# Altium PCB TFT_Adapter_Board_拼版.PcbDoc (part 1 of 9)
Units mm, origin at the board's own origin, x right, y up, seen from the top; angles counter-clockwise.
Board outline 137 x 166.56 mm, 2 copper layers (Top Layer, Bottom Layer); 80 components, 32 nets, 2615 pads, 0 vias.
Unrouted connection lines stored in the file: 1248.
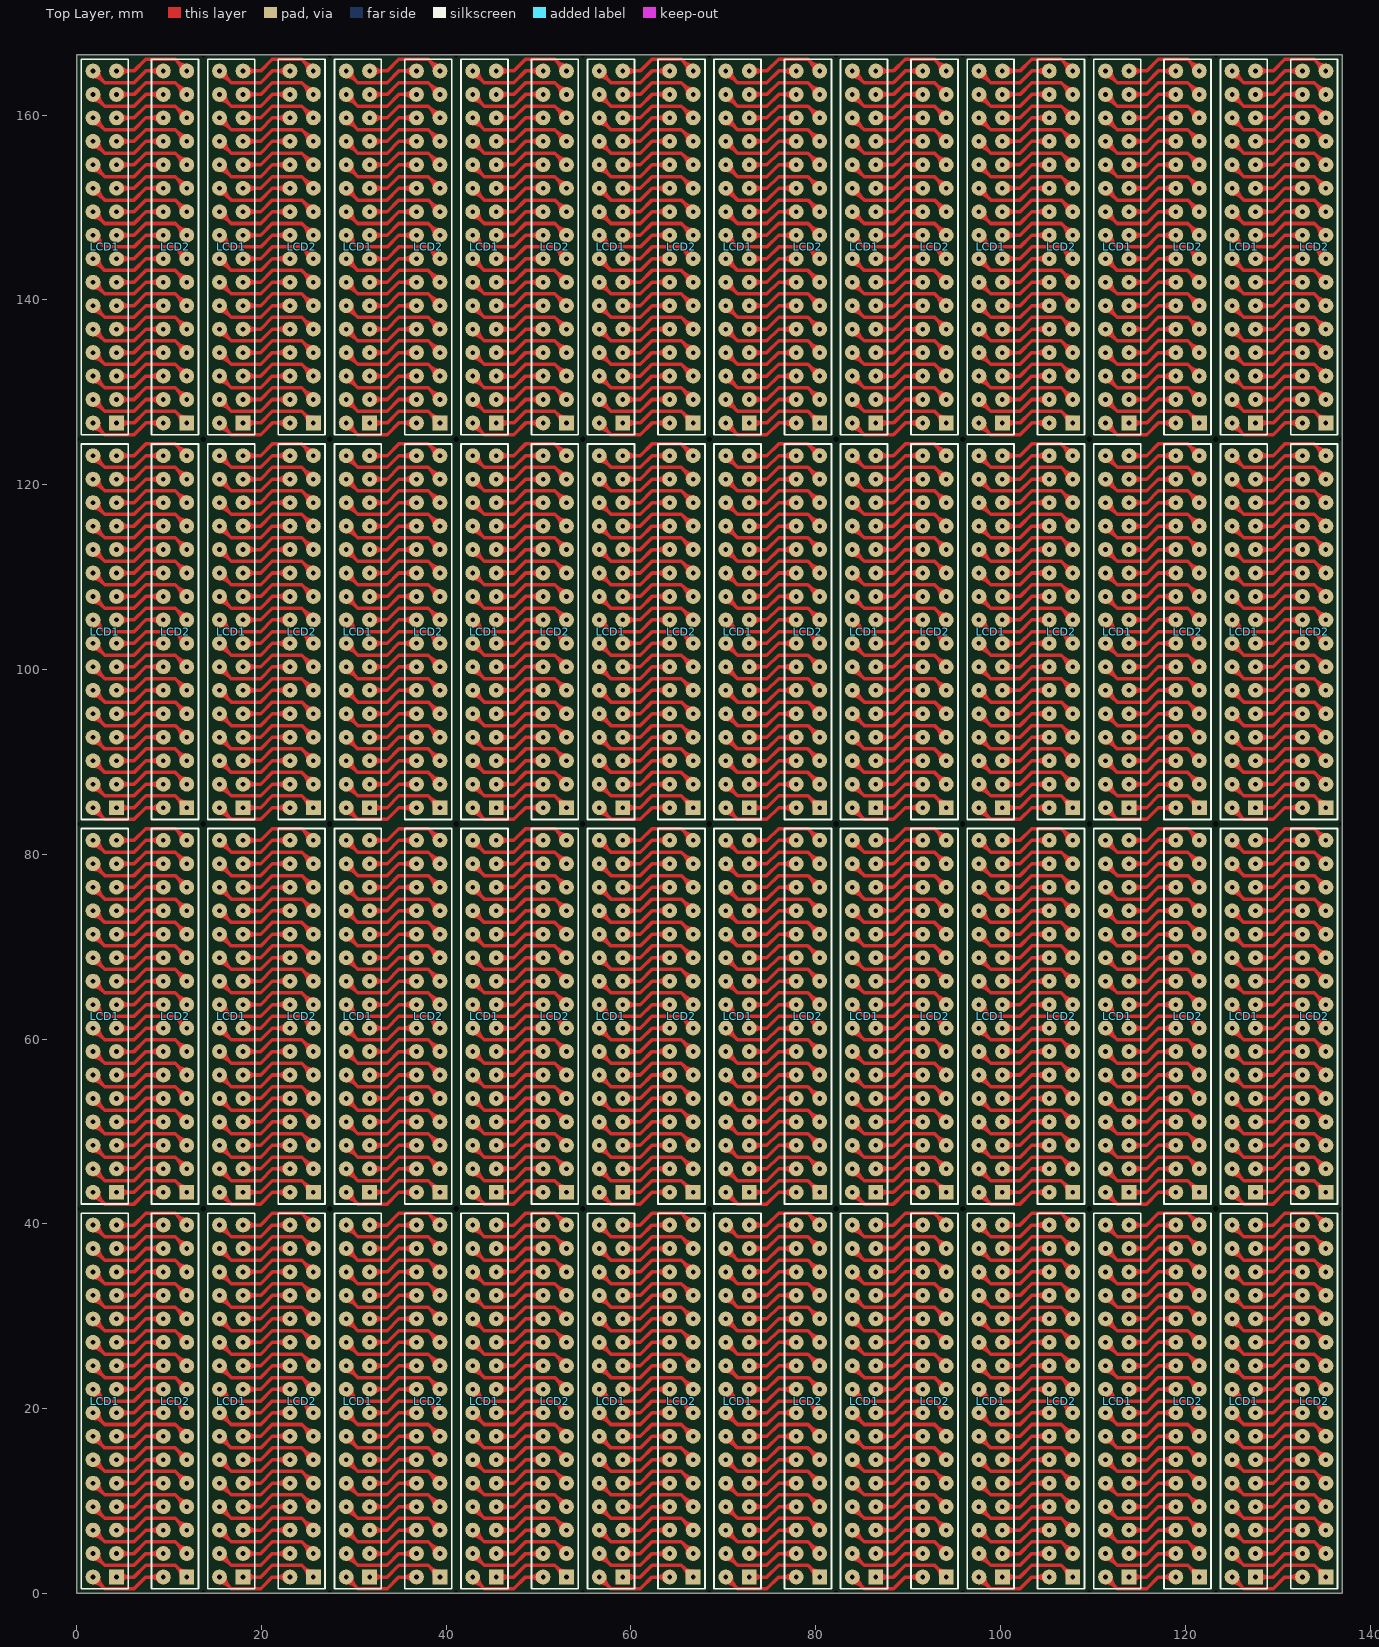
[diagram p0: Top Layer view]
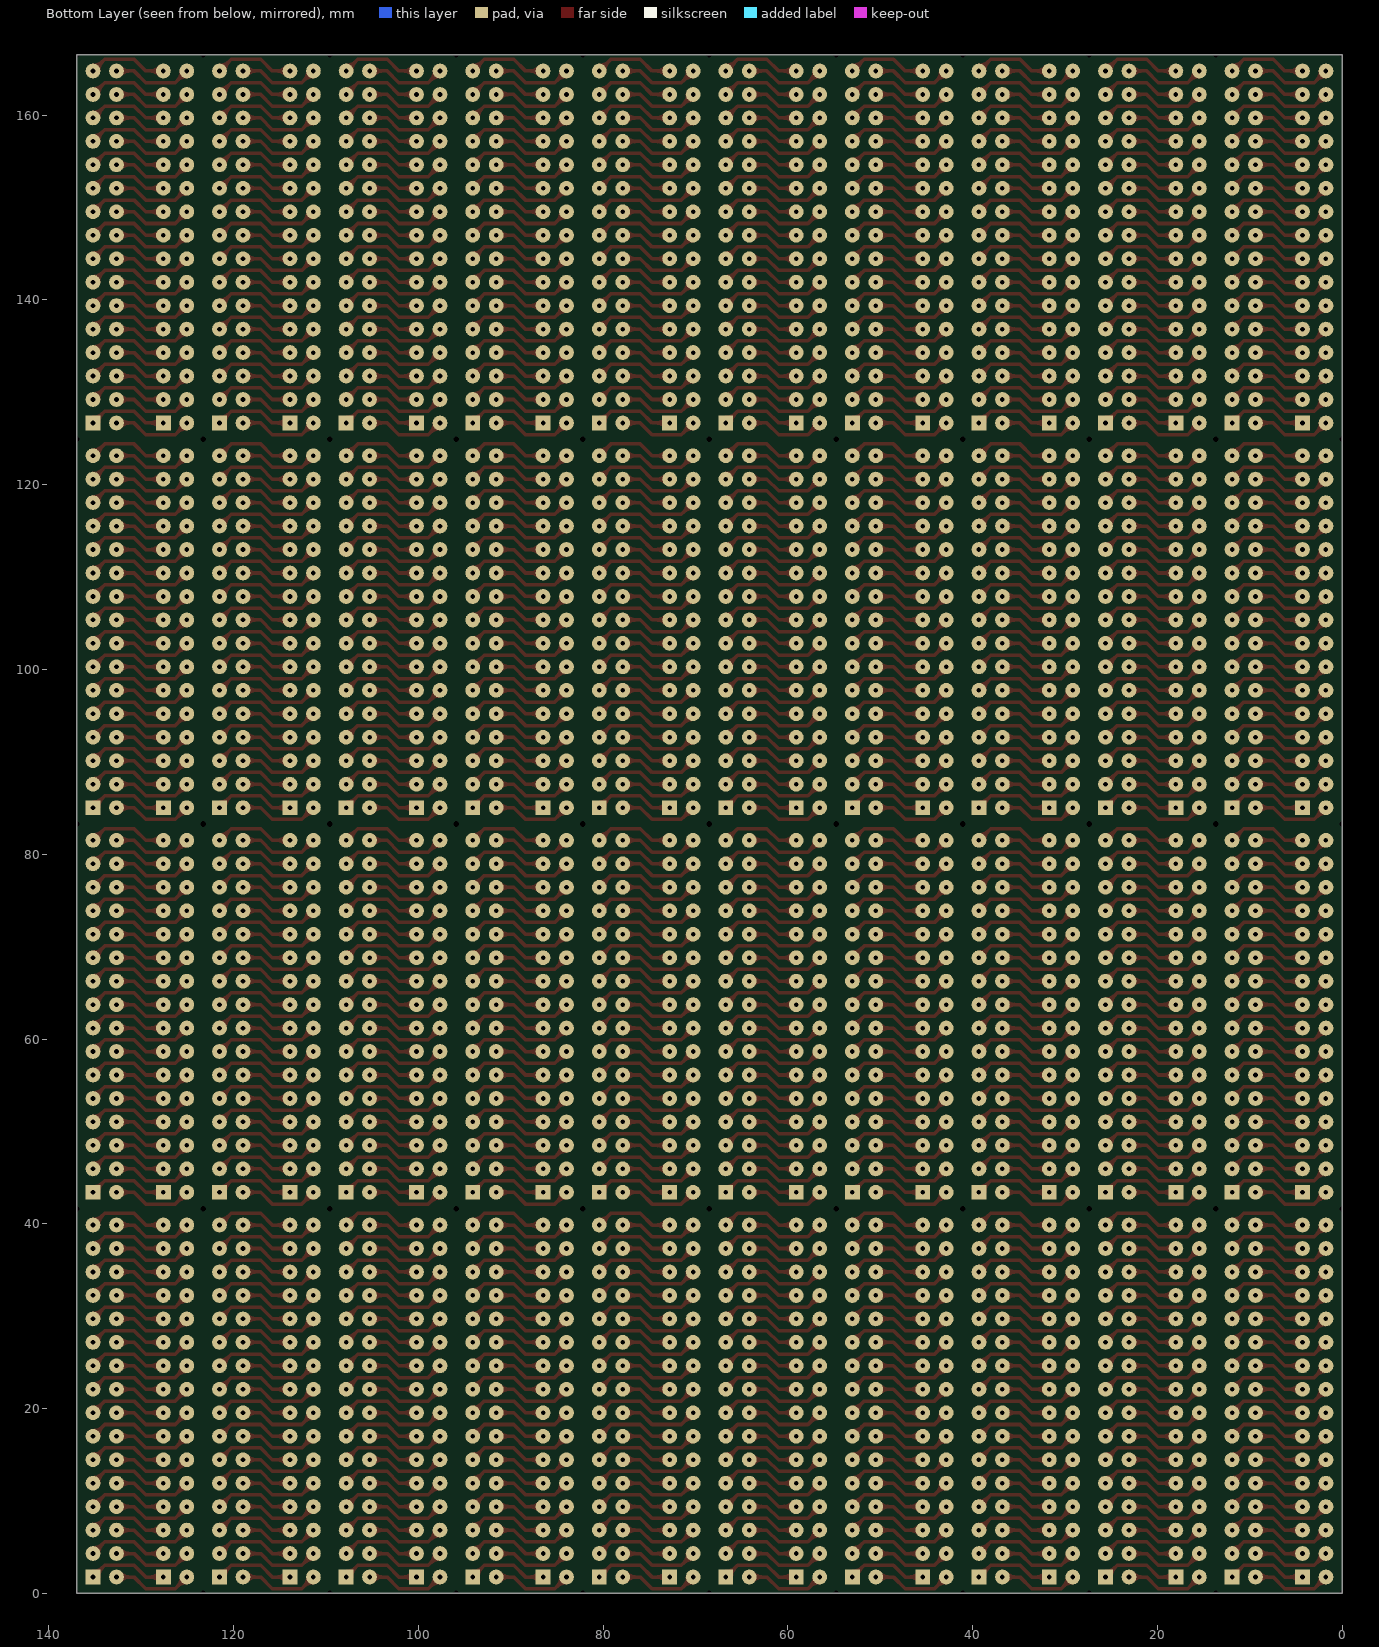
[diagram p1: Bottom Layer view, seen from below]

## Layer stack, top to bottom
Top Layer: signal copper 0.0356
Dielectric: dielectric 0.32, FR-4, Dk 4.8
Bottom Layer: signal copper 0.0356

## Board outline
0,0 137,0 137,166.56 0,166.56

## Design rules (kind name [scope] priority, off if disabled: settings)
Clearance [All] p1: gap=0.254
PolygonConnect [All] p1: connectstyle=Relief reliefconductorwidth=0.254 reliefentries=4 polygonreliefangle="90 Angle" airgapwidth=0.254
RoutingVias [All] p1: holewidth=0.711 width=1.27 viastyle="Through Hole" minholewidth=0.711 minwidth=1.27 maxholewidth=0.711 maxwidth=1.27
SolderMaskExpansion [All] p1: expansion=0.102
Width [All] p1: maxlimit=2.54 minlimit=0.254 preferedwidth=0.381
28 further rules are at their usual default settings.

## Components (designator, comment, footprint, x,y, rotation, side; value= is the part's Value field where it differs from the comment)
LCD1 "Header 16X2A" HDR2X16_CEN 4.31,126.69 r90 top
LCD1 "Header 16X2A" HDR2X16_CEN 18.01,126.69 r90 top
LCD1 "Header 16X2A" HDR2X16_CEN 31.71,126.69 r90 top
LCD1 "Header 16X2A" HDR2X16_CEN 45.41,126.69 r90 top
LCD1 "Header 16X2A" HDR2X16_CEN 59.11,126.69 r90 top
LCD1 "Header 16X2A" HDR2X16_CEN 72.81,126.69 r90 top
LCD1 "Header 16X2A" HDR2X16_CEN 86.51,126.69 r90 top
LCD1 "Header 16X2A" HDR2X16_CEN 100.21,126.69 r90 top
LCD1 "Header 16X2A" HDR2X16_CEN 113.91,126.69 r90 top
LCD1 "Header 16X2A" HDR2X16_CEN 127.61,126.69 r90 top
LCD1 "Header 16X2A" HDR2X16_CEN 4.31,85.05 r90 top
LCD1 "Header 16X2A" HDR2X16_CEN 18.01,85.05 r90 top
LCD1 "Header 16X2A" HDR2X16_CEN 31.71,85.05 r90 top
LCD1 "Header 16X2A" HDR2X16_CEN 45.41,85.05 r90 top
LCD1 "Header 16X2A" HDR2X16_CEN 59.11,85.05 r90 top
LCD1 "Header 16X2A" HDR2X16_CEN 72.81,85.05 r90 top
LCD1 "Header 16X2A" HDR2X16_CEN 86.51,85.05 r90 top
LCD1 "Header 16X2A" HDR2X16_CEN 100.21,85.05 r90 top
LCD1 "Header 16X2A" HDR2X16_CEN 113.91,85.05 r90 top
LCD1 "Header 16X2A" HDR2X16_CEN 127.61,85.05 r90 top
LCD1 "Header 16X2A" HDR2X16_CEN 4.31,43.41 r90 top
LCD1 "Header 16X2A" HDR2X16_CEN 18.01,43.41 r90 top
LCD1 "Header 16X2A" HDR2X16_CEN 31.71,43.41 r90 top
LCD1 "Header 16X2A" HDR2X16_CEN 45.41,43.41 r90 top
LCD1 "Header 16X2A" HDR2X16_CEN 59.11,43.41 r90 top
LCD1 "Header 16X2A" HDR2X16_CEN 72.81,43.41 r90 top
LCD1 "Header 16X2A" HDR2X16_CEN 86.51,43.41 r90 top
LCD1 "Header 16X2A" HDR2X16_CEN 100.21,43.41 r90 top
LCD1 "Header 16X2A" HDR2X16_CEN 113.91,43.41 r90 top
LCD1 "Header 16X2A" HDR2X16_CEN 127.61,43.41 r90 top
LCD1 "Header 16X2A" HDR2X16_CEN 127.61,1.77 r90 top
LCD1 "Header 16X2A" HDR2X16_CEN 113.91,1.77 r90 top
LCD1 "Header 16X2A" HDR2X16_CEN 100.21,1.77 r90 top
LCD1 "Header 16X2A" HDR2X16_CEN 86.51,1.77 r90 top
LCD1 "Header 16X2A" HDR2X16_CEN 72.81,1.77 r90 top
LCD1 "Header 16X2A" HDR2X16_CEN 59.11,1.77 r90 top
LCD1 "Header 16X2A" HDR2X16_CEN 45.41,1.77 r90 top
LCD1 "Header 16X2A" HDR2X16_CEN 31.71,1.77 r90 top
LCD1 "Header 16X2A" HDR2X16_CEN 18.01,1.77 r90 top
LCD1 "Header 16X2A" HDR2X16_CEN 4.31,1.77 r90 top
LCD2 "Header 16X2A" HDR2X16_CEN 11.93,126.69 r90 top
LCD2 "Header 16X2A" HDR2X16_CEN 25.63,126.69 r90 top
LCD2 "Header 16X2A" HDR2X16_CEN 39.33,126.69 r90 top
LCD2 "Header 16X2A" HDR2X16_CEN 53.03,126.69 r90 top
LCD2 "Header 16X2A" HDR2X16_CEN 66.73,126.69 r90 top
LCD2 "Header 16X2A" HDR2X16_CEN 80.43,126.69 r90 top
LCD2 "Header 16X2A" HDR2X16_CEN 94.13,126.69 r90 top
LCD2 "Header 16X2A" HDR2X16_CEN 107.83,126.69 r90 top
LCD2 "Header 16X2A" HDR2X16_CEN 121.53,126.69 r90 top
LCD2 "Header 16X2A" HDR2X16_CEN 135.23,126.69 r90 top
LCD2 "Header 16X2A" HDR2X16_CEN 11.93,85.05 r90 top
LCD2 "Header 16X2A" HDR2X16_CEN 25.63,85.05 r90 top
LCD2 "Header 16X2A" HDR2X16_CEN 39.33,85.05 r90 top
LCD2 "Header 16X2A" HDR2X16_CEN 53.03,85.05 r90 top
LCD2 "Header 16X2A" HDR2X16_CEN 66.73,85.05 r90 top
LCD2 "Header 16X2A" HDR2X16_CEN 80.43,85.05 r90 top
LCD2 "Header 16X2A" HDR2X16_CEN 94.13,85.05 r90 top
LCD2 "Header 16X2A" HDR2X16_CEN 107.83,85.05 r90 top
LCD2 "Header 16X2A" HDR2X16_CEN 121.53,85.05 r90 top
LCD2 "Header 16X2A" HDR2X16_CEN 135.23,85.05 r90 top
LCD2 "Header 16X2A" HDR2X16_CEN 11.93,43.41 r90 top
LCD2 "Header 16X2A" HDR2X16_CEN 25.63,43.41 r90 top
LCD2 "Header 16X2A" HDR2X16_CEN 39.33,43.41 r90 top
LCD2 "Header 16X2A" HDR2X16_CEN 53.03,43.41 r90 top
LCD2 "Header 16X2A" HDR2X16_CEN 66.73,43.41 r90 top
LCD2 "Header 16X2A" HDR2X16_CEN 80.43,43.41 r90 top
LCD2 "Header 16X2A" HDR2X16_CEN 94.13,43.41 r90 top
LCD2 "Header 16X2A" HDR2X16_CEN 107.83,43.41 r90 top
LCD2 "Header 16X2A" HDR2X16_CEN 121.53,43.41 r90 top
LCD2 "Header 16X2A" HDR2X16_CEN 135.23,43.41 r90 top
LCD2 "Header 16X2A" HDR2X16_CEN 135.23,1.77 r90 top
LCD2 "Header 16X2A" HDR2X16_CEN 121.53,1.77 r90 top
LCD2 "Header 16X2A" HDR2X16_CEN 107.83,1.77 r90 top
LCD2 "Header 16X2A" HDR2X16_CEN 94.13,1.77 r90 top
LCD2 "Header 16X2A" HDR2X16_CEN 80.43,1.77 r90 top
LCD2 "Header 16X2A" HDR2X16_CEN 66.73,1.77 r90 top
LCD2 "Header 16X2A" HDR2X16_CEN 53.03,1.77 r90 top
LCD2 "Header 16X2A" HDR2X16_CEN 39.33,1.77 r90 top
LCD2 "Header 16X2A" HDR2X16_CEN 25.63,1.77 r90 top
LCD2 "Header 16X2A" HDR2X16_CEN 11.93,1.77 r90 top

## Footprints (in the part's own frame and the unit in brackets; to place one, negate y for a bottom-side part, rotate by r counter-clockwise, add the part's x,y. Pads: shape width x height; smd on the part's side, far side on the other; paste and mask are expansions set on the pad)
HDR2X16_CEN [mm] "Connector; Header; 16x2 Position"
  rect 1.6x1.6 hole 0.5: 1(0,0)
  round 1.6 hole 0.5: 2(2.54,0) 3(5.08,0) 4(7.62,0) 5(10.16,0) 6(12.7,0) 7(15.24,0) 8(17.78,0) 9(20.32,0) 10(22.86,0) 11(25.4,0) 12(27.94,0) 13(30.48,0) 14(33.02,0) 15(35.56,0) 16(38.1,0)
  round 1.6 hole 0.5 unplated: 17(38.1,2.54) 18(35.56,2.54) 19(33.02,2.54) 20(30.48,2.54) 21(27.94,2.54) 22(25.4,2.54) 23(22.86,2.54) 24(20.32,2.54) 25(17.78,2.54) 26(15.24,2.54) 27(12.7,2.54) 28(10.16,2.54) 29(7.62,2.54) 30(5.08,2.54) 31(2.54,2.54) 32(0,2.54)
  silkscreen extent -1.27,-1.27 39.37,3.81

## Part data
LCD1 LCD1 LCD1 LCD1 LCD1 LCD1 LCD1 LCD1 LCD1 LCD1 LCD1 LCD1 LCD1 LCD1 LCD1 LCD1 LCD1 LCD1 LCD1 LCD1 LCD1 LCD1 LCD1 LCD1 LCD1 LCD1 LCD1 LCD1 LCD1 LCD1 LCD1 LCD1 LCD1 LCD1 LCD1 LCD1 LCD1 LCD1 LCD1 LCD1 LCD2 LCD2 LCD2 LCD2 LCD2 LCD2 LCD2 LCD2 LCD2 LCD2 LCD2 LCD2 LCD2 LCD2 LCD2 LCD2 LCD2 LCD2 LCD2 LCD2 LCD2 LCD2 LCD2 LCD2 LCD2 LCD2 LCD2 LCD2 LCD2 LCD2 LCD2 LCD2 LCD2 LCD2 LCD2 LCD2 LCD2 LCD2 LCD2 LCD2: "Header, 16-Pin, Dual row"

## Free pads (board coordinates)
  round 0.4 hole 0.6 unplated: 0(0,0) 0(0,41.64) 0(13.7,0) 0(13.7,41.64) 0(27.4,0) 0(27.4,41.64) 0(41.1,0) 0(41.1,41.64) 0(54.8,0) 0(54.8,41.64) 0(68.5,0) 0(68.5,41.64) 0(82.2,0) 0(82.2,41.64) 0(95.9,0) 0(95.9,41.64) 0(109.6,0) 0(109.6,41.64) 0(123.3,0) 0(123.3,41.64) 0(137,0) 0(137,41.64) 1(0,83.28) 1(13.7,83.28) 1(27.4,83.28) 1(41.1,83.28) 1(54.8,83.28) 1(68.5,83.28) 1(82.2,83.28) 1(95.9,83.28) 1(109.6,83.28) 1(123.3,83.28) 1(137,83.28) 2(0,124.92) 2(13.7,124.92) 2(27.4,124.92) 2(41.1,124.92) 2(54.8,124.92) 2(68.5,124.92) 2(82.2,124.92) 2(95.9,124.92) 2(109.6,124.92) 2(123.3,124.92) 2(137,124.92) 3(0,166.56) 3(13.7,166.56) 3(27.4,166.56) 3(41.1,166.56) 3(54.8,166.56) 3(68.5,166.56) 3(82.2,166.56) 3(95.9,166.56) 3(109.6,166.56) 3(123.3,166.56) 3(137,166.56)

## Nets (pads, with @x,y where several pads share a name; then routed paths per layer and width w, separated by ;. In a path a pad name is that pad's centre, name@x,y a point inside that pad or via, vN(x,y) a via of type N, cw(c..) or ccw(c..) an arc to the next point about the centre after c; other vN are vias at no path point)
NetLCD1_1: LCD1.1 LCD2.1 | length 531.8
  Top Layer w0.381: LCD1.1@4.31,1.77 6.215,1.77 7.485,3.04 10.66,3.04 LCD2.1@11.93,1.77 ; LCD1.1@4.31,43.41 6.215,43.41 7.485,44.68 10.66,44.68 LCD2.1@11.93,43.41 ; LCD1.1@4.31,85.05 6.215,85.05 7.485,86.32 10.66,86.32 LCD2.1@11.93,85.05 ; LCD1.1@4.31,126.69 6.215,126.69 7.485,127.96 10.66,127.96 LCD2.1@11.93,126.69 ; LCD1.1@4.741,1.339 cw(c5.781,0.299) 5.781,1.77 cw(c5.781,3.241) LCD1.1@4.741,2.201 ; LCD1.1@4.741,42.979 cw(c5.781,41.939) 5.781,43.41 cw(c5.781,44.881) LCD1.1@4.741,43.841 ; LCD1.1@4.741,84.619 cw(c5.781,83.579) 5.781,85.05 cw(c5.781,86.521) LCD1.1@4.741,85.481 ; LCD1.1@4.741,126.259 cw(c5.781,125.219) 5.781,126.69 cw(c5.781,128.161) LCD1.1@4.741,127.121 ; LCD2.1@11.321,1.77 ccw(c9.849,1.77) 10.89,2.81 ccw(c11.93,3.851) LCD2.1@11.93,2.379 ; LCD2.1@11.321,43.41 ccw(c9.849,43.41) 10.89,44.45 ccw(c11.93,45.491) LCD2.1@11.93,44.019 ; LCD2.1@11.321,85.05 ccw(c9.849,85.05) 10.89,86.09 ccw(c11.93,87.131) LCD2.1@11.93,85.659 ; LCD2.1@11.321,126.69 ccw(c9.849,126.69) 10.89,127.73 ccw(c11.93,128.771) LCD2.1@11.93,127.299 ; LCD1.1@18.01,1.77 19.915,1.77 21.185,3.04 24.36,3.04 LCD2.1@25.63,1.77 ; LCD1.1@18.01,43.41 19.915,43.41 21.185,44.68 24.36,44.68 LCD2.1@25.63,43.41 ; LCD1.1@18.01,85.05 19.915,85.05 21.185,86.32 24.36,86.32 LCD2.1@25.63,85.05 ; LCD1.1@18.01,126.69 19.915,126.69 21.185,127.96 24.36,127.96 LCD2.1@25.63,126.69 ; LCD1.1@18.441,1.339 cw(c19.481,0.299) 19.481,1.77 cw(c19.481,3.241) LCD1.1@18.441,2.201 ; LCD1.1@18.441,42.979 cw(c19.481,41.939) 19.481,43.41 cw(c19.481,44.881) LCD1.1@18.441,43.841 ; LCD1.1@18.441,84.619 cw(c19.481,83.579) 19.481,85.05 cw(c19.481,86.521) LCD1.1@18.441,85.481 ; LCD1.1@18.441,126.259 cw(c19.481,125.219) 19.481,126.69 cw(c19.481,128.161) LCD1.1@18.441,127.121 ; LCD2.1@25.02,1.77 ccw(c23.549,1.77) 24.59,2.81 ccw(c25.63,3.851) LCD2.1@25.63,2.379 ; LCD2.1@25.02,43.41 ccw(c23.549,43.41) 24.59,44.45 ccw(c25.63,45.491) LCD2.1@25.63,44.019 ; LCD2.1@25.02,85.05 ccw(c23.549,85.05) 24.59,86.09 ccw(c25.63,87.131) LCD2.1@25.63,85.659 ; LCD2.1@25.02,126.69 ccw(c23.549,126.69) 24.59,127.73 ccw(c25.63,128.771) LCD2.1@25.63,127.299 ; LCD1.1@31.71,1.77 33.615,1.77 34.885,3.04 38.06,3.04 LCD2.1@39.33,1.77 ; LCD1.1@31.71,43.41 33.615,43.41 34.885,44.68 38.06,44.68 LCD2.1@39.33,43.41 ; LCD1.1@31.71,85.05 33.615,85.05 34.885,86.32 38.06,86.32 LCD2.1@39.33,85.05 ; LCD1.1@31.71,126.69 33.615,126.69 34.885,127.96 38.06,127.96 LCD2.1@39.33,126.69 ; LCD1.1@32.141,1.339 cw(c33.181,0.299) 33.181,1.77 cw(c33.181,3.241) LCD1.1@32.141,2.201 ; LCD1.1@32.141,42.979 cw(c33.181,41.939) 33.181,43.41 cw(c33.181,44.881) LCD1.1@32.141,43.841 ; LCD1.1@32.141,84.619 cw(c33.181,83.579) 33.181,85.05 cw(c33.181,86.521) LCD1.1@32.141,85.481 ; LCD1.1@32.141,126.259 cw(c33.181,125.219) 33.181,126.69 cw(c33.181,128.161) LCD1.1@32.141,127.121 ; LCD2.1@38.72,1.77 ccw(c37.249,1.77) 38.29,2.81 ccw(c39.33,3.851) LCD2.1@39.33,2.379 ; LCD2.1@38.72,43.41 ccw(c37.249,43.41) 38.29,44.45 ccw(c39.33,45.491) LCD2.1@39.33,44.019 ; LCD2.1@38.72,85.05 ccw(c37.249,85.05) 38.29,86.09 ccw(c39.33,87.131) LCD2.1@39.33,85.659 ; LCD2.1@38.72,126.69 ccw(c37.249,126.69) 38.29,127.73 ccw(c39.33,128.771) LCD2.1@39.33,127.299 ; LCD1.1@45.41,1.77 47.315,1.77 48.585,3.04 51.76,3.04 LCD2.1@53.03,1.77 ; LCD1.1@45.41,43.41 47.315,43.41 48.585,44.68 51.76,44.68 LCD2.1@53.03,43.41 ; LCD1.1@45.41,85.05 47.315,85.05 48.585,86.32 51.76,86.32 LCD2.1@53.03,85.05 ; LCD1.1@45.41,126.69 47.315,126.69 48.585,127.96 51.76,127.96 LCD2.1@53.03,126.69 ; LCD1.1@45.841,1.339 cw(c46.881,0.299) 46.881,1.77 cw(c46.881,3.241) LCD1.1@45.841,2.201 ; LCD1.1@45.841,42.979 cw(c46.881,41.939) 46.881,43.41 cw(c46.881,44.881) LCD1.1@45.841,43.841 ; LCD1.1@45.841,84.619 cw(c46.881,83.579) 46.881,85.05 cw(c46.881,86.521) LCD1.1@45.841,85.481 ; LCD1.1@45.841,126.259 cw(c46.881,125.219) 46.881,126.69 cw(c46.881,128.161) LCD1.1@45.841,127.121 ; LCD2.1@52.42,1.77 ccw(c50.949,1.77) 51.99,2.81 ccw(c53.03,3.851) LCD2.1@53.03,2.379 ; LCD2.1@52.42,43.41 ccw(c50.949,43.41) 51.99,44.45 ccw(c53.03,45.491) LCD2.1@53.03,44.019 ; LCD2.1@52.42,85.05 ccw(c50.949,85.05) 51.99,86.09 ccw(c53.03,87.131) LCD2.1@53.03,85.659 ; LCD2.1@52.42,126.69 ccw(c50.949,126.69) 51.99,127.73 ccw(c53.03,128.771) LCD2.1@53.03,127.299 ; LCD1.1@59.11,1.77 61.015,1.77 62.285,3.04 65.46,3.04 LCD2.1@66.73,1.77 ; LCD1.1@59.11,43.41 61.015,43.41 62.285,44.68 65.46,44.68 LCD2.1@66.73,43.41 ; LCD1.1@59.11,85.05 61.015,85.05 62.285,86.32 65.46,86.32 LCD2.1@66.73,85.05 ; LCD1.1@59.11,126.69 61.015,126.69 62.285,127.96 65.46,127.96 LCD2.1@66.73,126.69 ; LCD1.1@59.541,1.339 cw(c60.581,0.299) 60.581,1.77 cw(c60.581,3.241) LCD1.1@59.541,2.201 ; LCD1.1@59.541,42.979 cw(c60.581,41.939) 60.581,43.41 cw(c60.581,44.881) LCD1.1@59.541,43.841 ; LCD1.1@59.541,84.619 cw(c60.581,83.579) 60.581,85.05 cw(c60.581,86.521) LCD1.1@59.541,85.481 ; LCD1.1@59.541,126.259 cw(c60.581,125.219) 60.581,126.69 cw(c60.581,128.161) LCD1.1@59.541,127.121 ; LCD2.1@66.12,1.77 ccw(c64.649,1.77) 65.69,2.81 ccw(c66.73,3.851) LCD2.1@66.73,2.379 ; LCD2.1@66.12,43.41 ccw(c64.649,43.41) 65.69,44.45 ccw(c66.73,45.491) LCD2.1@66.73,44.019 ; LCD2.1@66.12,85.05 ccw(c64.649,85.05) 65.69,86.09 ccw(c66.73,87.131) LCD2.1@66.73,85.659 ; LCD2.1@66.12,126.69 ccw(c64.649,126.69) 65.69,127.73 ccw(c66.73,128.771) LCD2.1@66.73,127.299 ; LCD1.1@72.81,1.77 74.715,1.77 75.985,3.04 79.16,3.04 LCD2.1@80.43,1.77 ; LCD1.1@72.81,43.41 74.715,43.41 75.985,44.68 79.16,44.68 LCD2.1@80.43,43.41 ; LCD1.1@72.81,85.05 74.715,85.05 75.985,86.32 79.16,86.32 LCD2.1@80.43,85.05 ; LCD1.1@72.81,126.69 74.715,126.69 75.985,127.96 79.16,127.96 LCD2.1@80.43,126.69 ; LCD1.1@73.241,1.339 cw(c74.281,0.299) 74.281,1.77 cw(c74.281,3.241) LCD1.1@73.241,2.201 ; LCD1.1@73.241,42.979 cw(c74.281,41.939) 74.281,43.41 cw(c74.281,44.881) LCD1.1@73.241,43.841 ; LCD1.1@73.241,84.619 cw(c74.281,83.579) 74.281,85.05 cw(c74.281,86.521) LCD1.1@73.241,85.481 ; LCD1.1@73.241,126.259 cw(c74.281,125.219) 74.281,126.69 cw(c74.281,128.161) LCD1.1@73.241,127.121 ; LCD2.1@79.82,1.77 ccw(c78.349,1.77) 79.39,2.81 ccw(c80.43,3.851) LCD2.1@80.43,2.379 ; LCD2.1@79.82,43.41 ccw(c78.349,43.41) 79.39,44.45 ccw(c80.43,45.491) LCD2.1@80.43,44.019 ; LCD2.1@79.82,85.05 ccw(c78.349,85.05) 79.39,86.09 ccw(c80.43,87.131) LCD2.1@80.43,85.659 ; LCD2.1@79.82,126.69 ccw(c78.349,126.69) 79.39,127.73 ccw(c80.43,128.771) LCD2.1@80.43,127.299 ; LCD1.1@86.51,1.77 88.415,1.77 89.685,3.04 92.86,3.04 LCD2.1@94.13,1.77 ; LCD1.1@86.51,43.41 88.415,43.41 89.685,44.68 92.86,44.68 LCD2.1@94.13,43.41 ; LCD1.1@86.51,85.05 88.415,85.05 89.685,86.32 92.86,86.32 LCD2.1@94.13,85.05 ; LCD1.1@86.51,126.69 88.415,126.69 89.685,127.96 92.86,127.96 LCD2.1@94.13,126.69 ; LCD1.1@86.941,1.339 cw(c87.981,0.299) 87.981,1.77 cw(c87.981,3.241) LCD1.1@86.941,2.201 ; LCD1.1@86.941,42.979 cw(c87.981,41.939) 87.981,43.41 cw(c87.981,44.881) LCD1.1@86.941,43.841 ; LCD1.1@86.941,84.619 cw(c87.981,83.579) 87.981,85.05 cw(c87.981,86.521) LCD1.1@86.941,85.481 ; LCD1.1@86.941,126.259 cw(c87.981,125.219) 87.981,126.69 cw(c87.981,128.161) LCD1.1@86.941,127.121 ; LCD2.1@93.52,1.77 ccw(c92.049,1.77) 93.09,2.81 ccw(c94.13,3.851) LCD2.1@94.13,2.379 ; LCD2.1@93.52,43.41 ccw(c92.049,43.41) 93.09,44.45 ccw(c94.13,45.491) LCD2.1@94.13,44.019 ; LCD2.1@93.52,85.05 ccw(c92.049,85.05) 93.09,86.09 ccw(c94.13,87.131) LCD2.1@94.13,85.659 ; LCD2.1@93.52,126.69 ccw(c92.049,126.69) 93.09,127.73 ccw(c94.13,128.771) LCD2.1@94.13,127.299 ; LCD1.1@100.21,1.77 102.115,1.77 103.385,3.04 106.56,3.04 LCD2.1@107.83,1.77 ; LCD1.1@100.21,43.41 102.115,43.41 103.385,44.68 106.56,44.68 LCD2.1@107.83,43.41 ; LCD1.1@100.21,85.05 102.115,85.05 103.385,86.32 106.56,86.32 LCD2.1@107.83,85.05 ; LCD1.1@100.21,126.69 102.115,126.69 103.385,127.96 106.56,127.96 LCD2.1@107.83,126.69 ; LCD1.1@100.641,1.339 cw(c101.681,0.299) 101.681,1.77 cw(c101.681,3.241) LCD1.1@100.641,2.201 ; LCD1.1@100.641,42.979 cw(c101.681,41.939) 101.681,43.41 cw(c101.681,44.881) LCD1.1@100.641,43.841 ; LCD1.1@100.641,84.619 cw(c101.681,83.579) 101.681,85.05 cw(c101.681,86.521) LCD1.1@100.641,85.481 ; LCD1.1@100.641,126.259 cw(c101.681,125.219) 101.681,126.69 cw(c101.681,128.161) LCD1.1@100.641,127.121 ; LCD2.1@107.22,1.77 ccw(c105.749,1.77) 106.79,2.81 ccw(c107.83,3.851) LCD2.1@107.83,2.379 ; LCD2.1@107.22,43.41 ccw(c105.749,43.41) 106.79,44.45 ccw(c107.83,45.491) LCD2.1@107.83,44.019 ; LCD2.1@107.22,85.05 ccw(c105.749,85.05) 106.79,86.09 ccw(c107.83,87.131) LCD2.1@107.83,85.659 ; LCD2.1@107.22,126.69 ccw(c105.749,126.69) 106.79,127.73 ccw(c107.83,128.771) LCD2.1@107.83,127.299 ; LCD1.1@113.91,1.77 115.815,1.77 117.085,3.04 120.26,3.04 LCD2.1@121.53,1.77 ; LCD1.1@113.91,43.41 115.815,43.41 117.085,44.68 120.26,44.68 LCD2.1@121.53,43.41 ; LCD1.1@113.91,85.05 115.815,85.05 117.085,86.32 120.26,86.32 LCD2.1@121.53,85.05 ; LCD1.1@113.91,126.69 115.815,126.69 117.085,127.96 120.26,127.96 LCD2.1@121.53,126.69 ; LCD1.1@114.341,1.339 cw(c115.381,0.299) 115.381,1.77 cw(c115.381,3.241) LCD1.1@114.341,2.201 ; LCD1.1@114.341,42.979 cw(c115.381,41.939) 115.381,43.41 cw(c115.381,44.881) LCD1.1@114.341,43.841 ; LCD1.1@114.341,84.619 cw(c115.381,83.579) 115.381,85.05 cw(c115.381,86.521) LCD1.1@114.341,85.481 ; LCD1.1@114.341,126.259 cw(c115.381,125.219) 115.381,126.69 cw(c115.381,128.161) LCD1.1@114.341,127.121 ; LCD2.1@120.92,1.77 ccw(c119.449,1.77) 120.49,2.81 ccw(c121.53,3.851) LCD2.1@121.53,2.379 ; LCD2.1@120.92,43.41 ccw(c119.449,43.41) 120.49,44.45 ccw(c121.53,45.491) LCD2.1@121.53,44.019 ; LCD2.1@120.92,85.05 ccw(c119.449,85.05) 120.49,86.09 ccw(c121.53,87.131) LCD2.1@121.53,85.659 ; LCD2.1@120.92,126.69 ccw(c119.449,126.69) 120.49,127.73 ccw(c121.53,128.771) LCD2.1@121.53,127.299 ; LCD1.1@127.61,1.77 129.515,1.77 130.785,3.04 133.96,3.04 LCD2.1@135.23,1.77 ; LCD1.1@127.61,43.41 129.515,43.41 130.785,44.68 133.96,44.68 LCD2.1@135.23,43.41 ; LCD1.1@127.61,85.05 129.515,85.05 130.785,86.32 133.96,86.32 LCD2.1@135.23,85.05 ; LCD1.1@127.61,126.69 129.515,126.69 130.785,127.96 133.96,127.96 LCD2.1@135.23,126.69 ; LCD1.1@128.041,1.339 cw(c129.081,0.299) 129.081,1.77 cw(c129.081,3.241) LCD1.1@128.041,2.201 ; LCD1.1@128.041,42.979 cw(c129.081,41.939) 129.081,43.41 cw(c129.081,44.881) LCD1.1@128.041,43.841 ; LCD1.1@128.041,84.619 cw(c129.081,83.579) 129.081,85.05 cw(c129.081,86.521) LCD1.1@128.041,85.481 ; LCD1.1@128.041,126.259 cw(c129.081,125.219) 129.081,126.69 cw(c129.081,128.161) LCD1.1@128.041,127.121 ; LCD2.1@134.62,1.77 ccw(c133.149,1.77) 134.19,2.81 ccw(c135.23,3.851) LCD2.1@135.23,2.379 ; LCD2.1@134.62,43.41 ccw(c133.149,43.41) 134.19,44.45 ccw(c135.23,45.491) LCD2.1@135.23,44.019 ; LCD2.1@134.62,85.05 ccw(c133.149,85.05) 134.19,86.09 ccw(c135.23,87.131) LCD2.1@135.23,85.659 ; LCD2.1@134.62,126.69 ccw(c133.149,126.69) 134.19,127.73 ccw(c135.23,128.771) LCD2.1@135.23,127.299
NetLCD1_2: LCD1.2 LCD2.2 | length 531.8
  Top Layer w0.381: LCD1.2@4.31,4.31 6.215,4.31 7.485,5.58 10.66,5.58 LCD2.2@11.93,4.31 ; LCD1.2@4.31,45.95 6.215,45.95 7.485,47.22 10.66,47.22 LCD2.2@11.93,45.95 ; LCD1.2@4.31,87.59 6.215,87.59 7.485,88.86 10.66,88.86 LCD2.2@11.93,87.59 ; LCD1.2@4.31,129.23 6.215,129.23 7.485,130.5 10.66,130.5 LCD2.2@11.93,129.23 ; LCD1.2@4.741,3.879 cw(c5.781,2.839) 5.781,4.31 cw(c5.781,5.781) LCD1.2@4.741,4.741 ; LCD1.2@4.741,45.519 cw(c5.781,44.479) 5.781,45.95 cw(c5.781,47.421) LCD1.2@4.741,46.381 ; LCD1.2@4.741,87.159 cw(c5.781,86.119) 5.781,87.59 cw(c5.781,89.061) LCD1.2@4.741,88.021 ; LCD1.2@4.741,128.799 cw(c5.781,127.759) 5.781,129.23 cw(c5.781,130.701) LCD1.2@4.741,129.661 ; LCD2.2@11.321,4.31 ccw(c9.849,4.31) 10.89,5.35 ccw(c11.93,6.391) LCD2.2@11.93,4.919 ; LCD2.2@11.321,45.95 ccw(c9.849,45.95) 10.89,46.99 ccw(c11.93,48.031) LCD2.2@11.93,46.559 ; LCD2.2@11.321,87.59 ccw(c9.849,87.59) 10.89,88.63 ccw(c11.93,89.671) LCD2.2@11.93,88.199 ; LCD2.2@11.321,129.23 ccw(c9.849,129.23) 10.89,130.27 ccw(c11.93,131.311) LCD2.2@11.93,129.839 ; LCD1.2@18.01,4.31 19.915,4.31 21.185,5.58 24.36,5.58 LCD2.2@25.63,4.31 ; LCD1.2@18.01,45.95 19.915,45.95 21.185,47.22 24.36,47.22 LCD2.2@25.63,45.95 ; LCD1.2@18.01,87.59 19.915,87.59 21.185,88.86 24.36,88.86 LCD2.2@25.63,87.59 ; LCD1.2@18.01,129.23 19.915,129.23 21.185,130.5 24.36,130.5 LCD2.2@25.63,129.23 ; LCD1.2@18.441,3.879 cw(c19.481,2.839) 19.481,4.31 cw(c19.481,5.781) LCD1.2@18.441,4.741 ; LCD1.2@18.441,45.519 cw(c19.481,44.479) 19.481,45.95 cw(c19.481,47.421) LCD1.2@18.441,46.381 ; LCD1.2@18.441,87.159 cw(c19.481,86.119) 19.481,87.59 cw(c19.481,89.061) LCD1.2@18.441,88.021 ; LCD1.2@18.441,128.799 cw(c19.481,127.759) 19.481,129.23 cw(c19.481,130.701) LCD1.2@18.441,129.661 ; LCD2.2@25.02,4.31 ccw(c23.549,4.31) 24.59,5.35 ccw(c25.63,6.391) LCD2.2@25.63,4.919 ; LCD2.2@25.02,45.95 ccw(c23.549,45.95) 24.59,46.99 ccw(c25.63,48.031) LCD2.2@25.63,46.559 ; LCD2.2@25.02,87.59 ccw(c23.549,87.59) 24.59,88.63 ccw(c25.63,89.671) LCD2.2@25.63,88.199 ; LCD2.2@25.02,129.23 ccw(c23.549,129.23) 24.59,130.27 ccw(c25.63,131.311) LCD2.2@25.63,129.839 ; LCD1.2@31.71,4.31 33.615,4.31 34.885,5.58 38.06,5.58 LCD2.2@39.33,4.31 ; LCD1.2@31.71,45.95 33.615,45.95 34.885,47.22 38.06,47.22 LCD2.2@39.33,45.95 ; LCD1.2@31.71,87.59 33.615,87.59 34.885,88.86 38.06,88.86 LCD2.2@39.33,87.59 ; LCD1.2@31.71,129.23 33.615,129.23 34.885,130.5 38.06,130.5 LCD2.2@39.33,129.23 ; LCD1.2@32.141,3.879 cw(c33.181,2.839) 33.181,4.31 cw(c33.181,5.781) LCD1.2@32.141,4.741 ; LCD1.2@32.141,45.519 cw(c33.181,44.479) 33.181,45.95 cw(c33.181,47.421) LCD1.2@32.141,46.381 ; LCD1.2@32.141,87.159 cw(c33.181,86.119) 33.181,87.59 cw(c33.181,89.061) LCD1.2@32.141,88.021 ; LCD1.2@32.141,128.799 cw(c33.181,127.759) 33.181,129.23 cw(c33.181,130.701) LCD1.2@32.141,129.661 ; LCD2.2@38.72,4.31 ccw(c37.249,4.31) 38.29,5.35 ccw(c39.33,6.391) LCD2.2@39.33,4.919 ; LCD2.2@38.72,45.95 ccw(c37.249,45.95) 38.29,46.99 ccw(c39.33,48.031) LCD2.2@39.33,46.559 ; LCD2.2@38.72,87.59 ccw(c37.249,87.59) 38.29,88.63 ccw(c39.33,89.671) LCD2.2@39.33,88.199 ; LCD2.2@38.72,129.23 ccw(c37.249,129.23) 38.29,130.27 ccw(c39.33,131.311) LCD2.2@39.33,129.839 ; LCD1.2@45.41,4.31 47.315,4.31 48.585,5.58 51.76,5.58 LCD2.2@53.03,4.31 ; LCD1.2@45.41,45.95 47.315,45.95 48.585,47.22 51.76,47.22 LCD2.2@53.03,45.95 ; LCD1.2@45.41,87.59 47.315,87.59 48.585,88.86 51.76,88.86 LCD2.2@53.03,87.59 ; LCD1.2@45.41,129.23 47.315,129.23 48.585,130.5 51.76,130.5 LCD2.2@53.03,129.23 ; LCD1.2@45.841,3.879 cw(c46.881,2.839) 46.881,4.31 cw(c46.881,5.781) LCD1.2@45.841,4.741 ; LCD1.2@45.841,45.519 cw(c46.881,44.479) 46.881,45.95 cw(c46.881,47.421) LCD1.2@45.841,46.381 ; LCD1.2@45.841,87.159 cw(c46.881,86.119) 46.881,87.59 cw(c46.881,89.061) LCD1.2@45.841,88.021 ; LCD1.2@45.841,128.799 cw(c46.881,127.759) 46.881,129.23 cw(c46.881,130.701) LCD1.2@45.841,129.661 ; LCD2.2@52.42,4.31 ccw(c50.949,4.31) 51.99,5.35 ccw(c53.03,6.391) LCD2.2@53.03,4.919 ; LCD2.2@52.42,45.95 ccw(c50.949,45.95) 51.99,46.99 ccw(c53.03,48.031) LCD2.2@53.03,46.559 ; LCD2.2@52.42,87.59 ccw(c50.949,87.59) 51.99,88.63 ccw(c53.03,89.671) LCD2.2@53.03,88.199 ; LCD2.2@52.42,129.23 ccw(c50.949,129.23) 51.99,130.27 ccw(c53.03,131.311) LCD2.2@53.03,129.839 ; LCD1.2@59.11,4.31 61.015,4.31 62.285,5.58 65.46,5.58 LCD2.2@66.73,4.31 ; LCD1.2@59.11,45.95 61.015,45.95 62.285,47.22 65.46,47.22 LCD2.2@66.73,45.95 ; LCD1.2@59.11,87.59 61.015,87.59 62.285,88.86 65.46,88.86 LCD2.2@66.73,87.59 ; LCD1.2@59.11,129.23 61.015,129.23 62.285,130.5 65.46,130.5 LCD2.2@66.73,129.23 ; LCD1.2@59.541,3.879 cw(c60.581,2.839) 60.581,4.31 cw(c60.581,5.781) LCD1.2@59.541,4.741 ; LCD1.2@59.541,45.519 cw(c60.581,44.479) 60.581,45.95 cw(c60.581,47.421) LCD1.2@59.541,46.381 ; LCD1.2@59.541,87.159 cw(c60.581,86.119) 60.581,87.59 cw(c60.581,89.061) LCD1.2@59.541,88.021 ; LCD1.2@59.541,128.799 cw(c60.581,127.759) 60.581,129.23 cw(c60.581,130.701) LCD1.2@59.541,129.661 ; LCD2.2@66.12,4.31 ccw(c64.649,4.31) 65.69,5.35 ccw(c66.73,6.391) LCD2.2@66.73,4.919 ; LCD2.2@66.12,45.95 ccw(c64.649,45.95) 65.69,46.99 ccw(c66.73,48.031) LCD2.2@66.73,46.559 ; LCD2.2@66.12,87.59 ccw(c64.649,87.59) 65.69,88.63 ccw(c66.73,89.671) LCD2.2@66.73,88.199 ; LCD2.2@66.12,129.23 ccw(c64.649,129.23) 65.69,130.27 ccw(c66.73,131.311) LCD2.2@66.73,129.839 ; LCD1.2@72.81,4.31 74.715,4.31 75.985,5.58 79.16,5.58 LCD2.2@80.43,4.31 ; LCD1.2@72.81,45.95 74.715,45.95 75.985,47.22 79.16,47.22 LCD2.2@80.43,45.95 ; LCD1.2@72.81,87.59 74.715,87.59 75.985,88.86 79.16,88.86 LCD2.2@80.43,87.59 ; LCD1.2@72.81,129.23 74.715,129.23 75.985,130.5 79.16,130.5 LCD2.2@80.43,129.23 ; LCD1.2@73.241,3.879 cw(c74.281,2.839) 74.281,4.31 cw(c74.281,5.781) LCD1.2@73.241,4.741 ; LCD1.2@73.241,45.519 cw(c74.281,44.479) 74.281,45.95 cw(c74.281,47.421) LCD1.2@73.241,46.381 ; LCD1.2@73.241,87.159 cw(c74.281,86.119) 74.281,87.59 cw(c74.281,89.061) LCD1.2@73.241,88.021 ; LCD1.2@73.241,128.799 cw(c74.281,127.759) 74.281,129.23 cw(c74.281,130.701) LCD1.2@73.241,129.661 ; LCD2.2@79.82,4.31 ccw(c78.349,4.31) 79.39,5.35 ccw(c80.43,6.391) LCD2.2@80.43,4.919 ; LCD2.2@79.82,45.95 ccw(c78.349,45.95) 79.39,46.99 ccw(c80.43,48.031) LCD2.2@80.43,46.559 ; LCD2.2@79.82,87.59 ccw(c78.349,87.59) 79.39,88.63 ccw(c80.43,89.671) LCD2.2@80.43,88.199 ; LCD2.2@79.82,129.23 ccw(c78.349,129.23) 79.39,130.27 ccw(c80.43,131.311) LCD2.2@80.43,129.839 ; LCD1.2@86.51,4.31 88.415,4.31 89.685,5.58 92.86,5.58 LCD2.2@94.13,4.31 ; LCD1.2@86.51,45.95 88.415,45.95 89.685,47.22 92.86,47.22 LCD2.2@94.13,45.95 ; LCD1.2@86.51,87.59 88.415,87.59 89.685,88.86 92.86,88.86 LCD2.2@94.13,87.59 ; LCD1.2@86.51,129.23 88.415,129.23 89.685,130.5 92.86,130.5 LCD2.2@94.13,129.23 ; LCD1.2@86.941,3.879 cw(c87.981,2.839) 87.981,4.31 cw(c87.981,5.781) LCD1.2@86.941,4.741 ; LCD1.2@86.941,45.519 cw(c87.981,44.479) 87.981,45.95 cw(c87.981,47.421) LCD1.2@86.941,46.381 ; LCD1.2@86.941,87.159 cw(c87.981,86.119) 87.981,87.59 cw(c87.981,89.061) LCD1.2@86.941,88.021 ; LCD1.2@86.941,128.799 cw(c87.981,127.759) 87.981,129.23 cw(c87.981,130.701) LCD1.2@86.941,129.661 ; LCD2.2@93.52,4.31 ccw(c92.049,4.31) 93.09,5.35 ccw(c94.13,6.391) LCD2.2@94.13,4.919 ; LCD2.2@93.52,45.95 ccw(c92.049,45.95) 93.09,46.99 ccw(c94.13,48.031) LCD2.2@94.13,46.559 ; LCD2.2@93.52,87.59 ccw(c92.049,87.59) 93.09,88.63 ccw(c94.13,89.671) LCD2.2@94.13,88.199 ; LCD2.2@93.52,129.23 ccw(c92.049,129.23) 93.09,130.27 ccw(c94.13,131.311) LCD2.2@94.13,129.839 ; LCD1.2@100.21,4.31 102.115,4.31 103.385,5.58 106.56,5.58 LCD2.2@107.83,4.31 ; LCD1.2@100.21,45.95 102.115,45.95 103.385,47.22 106.56,47.22 LCD2.2@107.83,45.95 ; LCD1.2@100.21,87.59 102.115,87.59 103.385,88.86 106.56,88.86 LCD2.2@107.83,87.59 ; LCD1.2@100.21,129.23 102.115,129.23 103.385,130.5 106.56,130.5 LCD2.2@107.83,129.23 ; LCD1.2@100.641,3.879 cw(c101.681,2.839) 101.681,4.31 cw(c101.681,5.781) LCD1.2@100.641,4.741 ; LCD1.2@100.641,45.519 cw(c101.681,44.479) 101.681,45.95 cw(c101.681,47.421) LCD1.2@100.641,46.381 ; LCD1.2@100.641,87.159 cw(c101.681,86.119) 101.681,87.59 cw(c101.681,89.061) LCD1.2@100.641,88.021 ; LCD1.2@100.641,128.799 cw(c101.681,127.759) 101.681,129.23 cw(c101.681,130.701) LCD1.2@100.641,129.661 ; LCD2.2@107.22,4.31 ccw(c105.749,4.31) 106.79,5.35 ccw(c107.83,6.391) LCD2.2@107.83,4.919 ; LCD2.2@107.22,45.95 ccw(c105.749,45.95) 106.79,46.99 ccw(c107.83,48.031) LCD2.2@107.83,46.559 ; LCD2.2@107.22,87.59 ccw(c105.749,87.59) 106.79,88.63 ccw(c107.83,89.671) LCD2.2@107.83,88.199 ; LCD2.2@107.22,129.23 ccw(c105.749,129.23) 106.79,130.27 ccw(c107.83,131.311) LCD2.2@107.83,129.839 ; LCD1.2@113.91,4.31 115.815,4.31 117.085,5.58 120.26,5.58 LCD2.2@121.53,4.31 ; LCD1.2@113.91,45.95 115.815,45.95 117.085,47.22 120.26,47.22 LCD2.2@121.53,45.95 ; LCD1.2@113.91,87.59 115.815,87.59 117.085,88.86 120.26,88.86 LCD2.2@121.53,87.59 ; LCD1.2@113.91,129.23 115.815,129.23 117.085,130.5 120.26,130.5 LCD2.2@121.53,129.23 ; LCD1.2@114.341,3.879 cw(c115.381,2.839) 115.381,4.31 cw(c115.381,5.781) LCD1.2@114.341,4.741 ; LCD1.2@114.341,45.519 cw(c115.381,44.479) 115.381,45.95 cw(c115.381,47.421) LCD1.2@114.341,46.381 ; LCD1.2@114.341,87.159 cw(c115.381,86.119) 115.381,87.59 cw(c115.381,89.061) LCD1.2@114.341,88.021 ; LCD1.2@114.341,128.799 cw(c115.381,127.759) 115.381,129.23 cw(c115.381,130.701) LCD1.2@114.341,129.661 ; LCD2.2@120.92,4.31 ccw(c119.449,4.31) 120.49,5.35 ccw(c121.53,6.391) LCD2.2@121.53,4.919 ; LCD2.2@120.92,45.95 ccw(c119.449,45.95) 120.49,46.99 ccw(c121.53,48.031) LCD2.2@121.53,46.559 ; LCD2.2@120.92,87.59 ccw(c119.449,87.59) 120.49,88.63 ccw(c121.53,89.671) LCD2.2@121.53,88.199 ; LCD2.2@120.92,129.23 ccw(c119.449,129.23) 120.49,130.27 ccw(c121.53,131.311) LCD2.2@121.53,129.839 ; LCD1.2@127.61,4.31 129.515,4.31 130.785,5.58 133.96,5.58 LCD2.2@135.23,4.31 ; LCD1.2@127.61,45.95 129.515,45.95 130.785,47.22 133.96,47.22 LCD2.2@135.23,45.95 ; LCD1.2@127.61,87.59 129.515,87.59 130.785,88.86 133.96,88.86 LCD2.2@135.23,87.59 ; LCD1.2@127.61,129.23 129.515,129.23 130.785,130.5 133.96,130.5 LCD2.2@135.23,129.23 ; LCD1.2@128.041,3.879 cw(c129.081,2.839) 129.081,4.31 cw(c129.081,5.781) LCD1.2@128.041,4.741 ; LCD1.2@128.041,45.519 cw(c129.081,44.479) 129.081,45.95 cw(c129.081,47.421) LCD1.2@128.041,46.381 ; LCD1.2@128.041,87.159 cw(c129.081,86.119) 129.081,87.59 cw(c129.081,89.061) LCD1.2@128.041,88.021 ; LCD1.2@128.041,128.799 cw(c129.081,127.759) 129.081,129.23 cw(c129.081,130.701) LCD1.2@128.041,129.661 ; LCD2.2@134.62,4.31 ccw(c133.149,4.31) 134.19,5.35 ccw(c135.23,6.391) LCD2.2@135.23,4.919 ; LCD2.2@134.62,45.95 ccw(c133.149,45.95) 134.19,46.99 ccw(c135.23,48.031) LCD2.2@135.23,46.559 ; LCD2.2@134.62,87.59 ccw(c133.149,87.59) 134.19,88.63 ccw(c135.23,89.671) LCD2.2@135.23,88.199 ; LCD2.2@134.62,129.23 ccw(c133.149,129.23) 134.19,130.27 ccw(c135.23,131.311) LCD2.2@135.23,129.839
NetLCD1_3: LCD1.3 LCD2.3 | length 531.8
  Top Layer w0.381: LCD1.3@4.31,6.85 6.215,6.85 7.485,8.12 10.66,8.12 LCD2.3@11.93,6.85 ; LCD1.3@4.31,48.49 6.215,48.49 7.485,49.76 10.66,49.76 LCD2.3@11.93,48.49 ; LCD1.3@4.31,90.13 6.215,90.13 7.485,91.4 10.66,91.4 LCD2.3@11.93,90.13 ; LCD1.3@4.31,131.77 6.215,131.77 7.485,133.04 10.66,133.04 LCD2.3@11.93,131.77 ; LCD1.3@4.741,6.419 cw(c5.781,5.379) 5.781,6.85 cw(c5.781,8.321) LCD1.3@4.741,7.281 ; LCD1.3@4.741,48.059 cw(c5.781,47.019) 5.781,48.49 cw(c5.781,49.961) LCD1.3@4.741,48.921 ; LCD1.3@4.741,89.699 cw(c5.781,88.659) 5.781,90.13 cw(c5.781,91.601) LCD1.3@4.741,90.561 ; LCD1.3@4.741,131.339 cw(c5.781,130.299) 5.781,131.77 cw(c5.781,133.241) LCD1.3@4.741,132.201 ; LCD2.3@11.321,6.85 ccw(c9.849,6.85) 10.89,7.89 ccw(c11.93,8.931) LCD2.3@11.93,7.459 ; LCD2.3@11.321,48.49 ccw(c9.849,48.49) 10.89,49.53 ccw(c11.93,50.571) LCD2.3@11.93,49.099 ; LCD2.3@11.321,90.13 ccw(c9.849,90.13) 10.89,91.17 ccw(c11.93,92.211) LCD2.3@11.93,90.739 ; LCD2.3@11.321,131.77 ccw(c9.849,131.77) 10.89,132.81 ccw(c11.93,133.851) LCD2.3@11.93,132.379 ; LCD1.3@18.01,6.85 19.915,6.85 21.185,8.12 24.36,8.12 LCD2.3@25.63,6.85 ; LCD1.3@18.01,48.49 19.915,48.49 21.185,49.76 24.36,49.76 LCD2.3@25.63,48.49 ; LCD1.3@18.01,90.13 19.915,90.13 21.185,91.4 24.36,91.4 LCD2.3@25.63,90.13 ; LCD1.3@18.01,131.77 19.915,131.77 21.185,133.04 24.36,133.04 LCD2.3@25.63,131.77 ; LCD1.3@18.441,6.419 cw(c19.481,5.379) 19.481,6.85 cw(c19.481,8.321) LCD1.3@18.441,7.281 ; LCD1.3@18.441,48.059 cw(c19.481,47.019) 19.481,48.49 cw(c19.481,49.961) LCD1.3@18.441,48.921 ; LCD1.3@18.441,89.699 cw(c19.481,88.659) 19.481,90.13 cw(c19.481,91.601) LCD1.3@18.441,90.561 ; LCD1.3@18.441,131.339 cw(c19.481,130.299) 19.481,131.77 cw(c19.481,133.241) LCD1.3@18.441,132.201 ; LCD2.3@25.02,6.85 ccw(c23.549,6.85) 24.59,7.89 ccw(c25.63,8.931) LCD2.3@25.63,7.459 ; LCD2.3@25.02,48.49 ccw(c23.549,48.49) 24.59,49.53 ccw(c25.63,50.571) LCD2.3@25.63,49.099 ; LCD2.3@25.02,90.13 ccw(c23.549,90.13) 24.59,91.17 ccw(c25.63,92.211) LCD2.3@25.63,90.739 ; LCD2.3@25.02,131.77 ccw(c23.549,131.77) 24.59,132.81 ccw(c25.63,133.851) LCD2.3@25.63,132.379 ; LCD1.3@31.71,6.85 33.615,6.85 34.885,8.12 38.06,8.12 LCD2.3@39.33,6.85 ; LCD1.3@31.71,48.49 33.615,48.49 34.885,49.76 38.06,49.76 LCD2.3@39.33,48.49 ; LCD1.3@31.71,90.13 33.615,90.13 34.885,91.4 38.06,91.4 LCD2.3@39.33,90.13 ; LCD1.3@31.71,131.77 33.615,131.77 34.885,133.04 38.06,133.04 LCD2.3@39.33,131.77 ; LCD1.3@32.141,6.419 cw(c33.181,5.379) 33.181,6.85 cw(c33.181,8.321) LCD1.3@32.141,7.281 ; LCD1.3@32.141,48.059 cw(c33.181,47.019) 33.181,48.49 cw(c33.181,49.961) LCD1.3@32.141,48.921 ; LCD1.3@32.141,89.699 cw(c33.181,88.659) 33.181,90.13 cw(c33.181,91.601) LCD1.3@32.141,90.561 ; LCD1.3@32.141,131.339 cw(c33.181,130.299) 33.181,131.77 cw(c33.181,133.241) LCD1.3@32.141,132.201 ; LCD2.3@38.72,6.85 ccw(c37.249,6.85) 38.29,7.89 ccw(c39.33,8.931) LCD2.3@39.33,7.459 ; LCD2.3@38.72,48.49 ccw(c37.249,48.49) 38.29,49.53 ccw(c39.33,50.571) LCD2.3@39.33,49.099 ; LCD2.3@38.72,90.13 ccw(c37.249,90.13) 38.29,91.17 ccw(c39.33,92.211) LCD2.3@39.33,90.739 ; LCD2.3@38.72,131.77 ccw(c37.249,131.77) 38.29,132.81 ccw(c39.33,133.851) LCD2.3@39.33,132.379 ; LCD1.3@45.41,6.85 47.315,6.85 48.585,8.12 51.76,8.12 LCD2.3@53.03,6.85 ; LCD1.3@45.41,48.49 47.315,48.49 48.585,49.76 51.76,49.76 LCD2.3@53.03,48.49 ; LCD1.3@45.41,90.13 47.315,90.13 48.585,91.4 51.76,91.4 LCD2.3@53.03,90.13 ; LCD1.3@45.41,131.77 47.315,131.77 48.585,133.04 51.76,133.04 LCD2.3@53.03,131.77 ; LCD1.3@45.841,6.419 cw(c46.881,5.379) 46.881,6.85 cw(c46.881,8.321) LCD1.3@45.841,7.281 ; LCD1.3@45.841,48.059 cw(c46.881,47.019) 46.881,48.49 cw(c46.881,49.961) LCD1.3@45.841,48.921 ; LCD1.3@45.841,89.699 cw(c46.881,88.659) 46.881,90.13 cw(c46.881,91.601) LCD1.3@45.841,90.561 ; LCD1.3@45.841,131.339 cw(c46.881,130.299) 46.881,131.77 cw(c46.881,133.241) LCD1.3@45.841,132.201 ; LCD2.3@52.42,6.85 ccw(c50.949,6.85) 51.99,7.89 ccw(c53.03,8.931) LCD2.3@53.03,7.459 ; LCD2.3@52.42,48.49 ccw(c50.949,48.49) 51.99,49.53 ccw(c53.03,50.571) LCD2.3@53.03,49.099 ; LCD2.3@52.42,90.13 ccw(c50.949,90.13) 51.99,91.17 ccw(c53.03,92.211) LCD2.3@53.03,90.739 ; LCD2.3@52.42,131.77 ccw(c50.949,131.77) 51.99,132.81 ccw(c53.03,133.851) LCD2.3@53.03,132.379 ; LCD1.3@59.11,6.85 61.015,6.85 62.285,8.12 65.46,8.12 LCD2.3@66.73,6.85 ; LCD1.3@59.11,48.49 61.015,48.49 62.285,49.76 65.46,49.76 LCD2.3@66.73,48.49 ; LCD1.3@59.11,90.13 61.015,90.13 62.285,91.4 65.46,91.4 LCD2.3@66.73,90.13 ; LCD1.3@59.11,131.77 61.015,131.77 62.285,133.04 65.46,133.04 LCD2.3@66.73,131.77 ; LCD1.3@59.541,6.419 cw(c60.581,5.379) 60.581,6.85 cw(c60.581,8.321) LCD1.3@59.541,7.281 ; LCD1.3@59.541,48.059 cw(c60.581,47.019) 60.581,48.49 cw(c60.581,49.961) LCD1.3@59.541,48.921 ; LCD1.3@59.541,89.699 cw(c60.581,88.659) 60.581,90.13 cw(c60.581,91.601) LCD1.3@59.541,90.561 ; LCD1.3@59.541,131.339 cw(c60.581,130.299) 60.581,131.77 cw(c60.581,133.241) LCD1.3@59.541,132.201 ; LCD2.3@66.12,6.85 ccw(c64.649,6.85) 65.69,7.89 ccw(c66.73,8.931) LCD2.3@66.73,7.459 ; LCD2.3@66.12,48.49 ccw(c64.649,48.49) 65.69,49.53 ccw(c66.73,50.571) LCD2.3@66.73,49.099 ; LCD2.3@66.12,90.13 ccw(c64.649,90.13) 65.69,91.17 ccw(c66.73,92.211) LCD2.3@66.73,90.739 ; LCD2.3@66.12,131.77 ccw(c64.649,131.77) 65.69,132.81 ccw(c66.73,133.851) LCD2.3@66.73,132.379 ; LCD1.3@72.81,6.85 74.715,6.85 75.985,8.12 79.16,8.12 LCD2.3@80.43,6.85 ; LCD1.3@72.81,48.49 74.715,48.49 75.985,49.76 79.16,49.76 LCD2.3@80.43,48.49 ; LCD1.3@72.81,90.13 74.715,90.13 75.985,91.4 79.16,91.4 LCD2.3@80.43,90.13 ; LCD1.3@72.81,131.77 74.715,131.77 75.985,133.04 79.16,133.04 LCD2.3@80.43,131.77 ; LCD1.3@73.241,6.419 cw(c74.281,5.379) 74.281,6.85 cw(c74.281,8.321) LCD1.3@73.241,7.281 ; LCD1.3@73.241,48.059 cw(c74.281,47.019) 74.281,48.49 cw(c74.281,49.961) LCD1.3@73.241,48.921 ; LCD1.3@73.241,89.699 cw(c74.281,88.659) 74.281,90.13 cw(c74.281,91.601) LCD1.3@73.241,90.561 ; LCD1.3@73.241,131.339 cw(c74.281,130.299) 74.281,131.77 cw(c74.281,133.241) LCD1.3@73.241,132.201 ; LCD2.3@79.82,6.85 ccw(c78.349,6.85) 79.39,7.89 ccw(c80.43,8.931) LCD2.3@80.43,7.459 ; LCD2.3@79.82,48.49 ccw(c78.349,48.49) 79.39,49.53 ccw(c80.43,50.571) LCD2.3@80.43,49.099 ; LCD2.3@79.82,90.13 ccw(c78.349,90.13) 79.39,91.17 ccw(c80.43,92.211) LCD2.3@80.43,90.739 ; LCD2.3@79.82,131.77 ccw(c78.349,131.77) 79.39,132.81 ccw(c80.43,133.851) LCD2.3@80.43,132.379 ; LCD1.3@86.51,6.85 88.415,6.85 89.685,8.12 92.86,8.12 LCD2.3@94.13,6.85 ; LCD1.3@86.51,48.49 88.415,48.49 89.685,49.76 92.86,49.76 LCD2.3@94.13,48.49 ; LCD1.3@86.51,90.13 88.415,90.13 89.685,91.4 92.86,91.4 LCD2.3@94.13,90.13 ; LCD1.3@86.51,131.77 88.415,131.77 89.685,133.04 92.86,133.04 LCD2.3@94.13,131.77 ; LCD1.3@86.941,6.419 cw(c87.981,5.379) 87.981,6.85 cw(c87.981,8.321) LCD1.3@86.941,7.281 ; LCD1.3@86.941,48.059 cw(c87.981,47.019) 87.981,48.49 cw(c87.981,49.961) LCD1.3@86.941,48.921 ; LCD1.3@86.941,89.699 cw(c87.981,88.659) 87.981,90.13 cw(c87.981,91.601) LCD1.3@86.941,90.561 ; LCD1.3@86.941,131.339 cw(c87.981,130.299) 87.981,131.77 cw(c87.981,133.241) LCD1.3@86.941,132.201 ; LCD2.3@93.52,6.85 ccw(c92.049,6.85) 93.09,7.89 ccw(c94.13,8.931) LCD2.3@94.13,7.459 ; LCD2.3@93.52,48.49 ccw(c92.049,48.49) 93.09,49.53 ccw(c94.13,50.571) LCD2.3@94.13,49.099 ; LCD2.3@93.52,90.13 ccw(c92.049,90.13) 93.09,91.17 ccw(c94.13,92.211) LCD2.3@94.13,90.739 ; LCD2.3@93.52,131.77 ccw(c92.049,131.77) 93.09,132.81 ccw(c94.13,133.851) LCD2.3@94.13,132.379 ; LCD1.3@100.21,6.85 102.115,6.85 103.385,8.12 106.56,8.12 LCD2.3@107.83,6.85 ; LCD1.3@100.21,48.49 102.115,48.49 103.385,49.76 106.56,49.76 LCD2.3@107.83,48.49 ; LCD1.3@100.21,90.13 102.115,90.13 103.385,91.4 106.56,91.4 LCD2.3@107.83,90.13 ; LCD1.3@100.21,131.77 102.115,131.77 103.385,133.04 106.56,133.04 LCD2.3@107.83,131.77 ; LCD1.3@100.641,6.419 cw(c101.681,5.379) 101.681,6.85 cw(c101.681,8.321) LCD1.3@100.641,7.281 ; LCD1.3@100.641,48.059 cw(c101.681,47.019) 101.681,48.49 cw(c101.681,49.961) LCD1.3@100.641,48.921 ; LCD1.3@100.641,89.699 cw(c101.681,88.659) 101.681,90.13 cw(c101.681,91.601) LCD1.3@100.641,90.561 ; LCD1.3@100.641,131.339 cw(c101.681,130.299) 101.681,131.77 cw(c101.681,133.241) LCD1.3@100.641,132.201 ; LCD2.3@107.22,6.85 ccw(c105.749,6.85) 106.79,7.89 ccw(c107.83,8.931) LCD2.3@107.83,7.459 ; LCD2.3@107.22,48.49 ccw(c105.749,48.49) 106.79,49.53 ccw(c107.83,50.571) LCD2.3@107.83,49.099 ; LCD2.3@107.22,90.13 ccw(c105.749,90.13) 106.79,91.17 ccw(c107.83,92.211) LCD2.3@107.83,90.739 ; LCD2.3@107.22,131.77 ccw(c105.749,131.77) 106.79,132.81 ccw(c107.83,133.851) LCD2.3@107.83,132.379 ; LCD1.3@113.91,6.85 115.815,6.85 117.085,8.12 120.26,8.12 LCD2.3@121.53,6.85 ; LCD1.3@113.91,48.49 115.815,48.49 117.085,49.76 120.26,49.76 LCD2.3@121.53,48.49 ; LCD1.3@113.91,90.13 115.815,90.13 117.085,91.4 120.26,91.4 LCD2.3@121.53,90.13 ; LCD1.3@113.91,131.77 115.815,131.77 117.085,133.04 120.26,133.04 LCD2.3@121.53,131.77 ; LCD1.3@114.341,6.419 cw(c115.381,5.379) 115.381,6.85 cw(c115.381,8.321) LCD1.3@114.341,7.281 ; LCD1.3@114.341,48.059 cw(c115.381,47.019) 115.381,48.49 cw(c115.381,49.961) LCD1.3@114.341,48.921 ; LCD1.3@114.341,89.699 cw(c115.381,88.659) 115.381,90.13 cw(c115.381,91.601) LCD1.3@114.341,90.561 ; LCD1.3@114.341,131.339 cw(c115.381,130.299) 115.381,131.77 cw(c115.381,133.241) LCD1.3@114.341,132.201 ; LCD2.3@120.92,6.85 ccw(c119.449,6.85) 120.49,7.89 ccw(c121.53,8.931) LCD2.3@121.53,7.459 ; LCD2.3@120.92,48.49 ccw(c119.449,48.49) 120.49,49.53 ccw(c121.53,50.571) LCD2.3@121.53,49.099 ; LCD2.3@120.92,90.13 ccw(c119.449,90.13) 120.49,91.17 ccw(c121.53,92.211) LCD2.3@121.53,90.739 ; LCD2.3@120.92,131.77 ccw(c119.449,131.77) 120.49,132.81 ccw(c121.53,133.851) LCD2.3@121.53,132.379 ; LCD1.3@127.61,6.85 129.515,6.85 130.785,8.12 133.96,8.12 LCD2.3@135.23,6.85 ; LCD1.3@127.61,48.49 129.515,48.49 130.785,49.76 133.96,49.76 LCD2.3@135.23,48.49 ; LCD1.3@127.61,90.13 129.515,90.13 130.785,91.4 133.96,91.4 LCD2.3@135.23,90.13 ; LCD1.3@127.61,131.77 129.515,131.77 130.785,133.04 133.96,133.04 LCD2.3@135.23,131.77 ; LCD1.3@128.041,6.419 cw(c129.081,5.379) 129.081,6.85 cw(c129.081,8.321) LCD1.3@128.041,7.281 ; LCD1.3@128.041,48.059 cw(c129.081,47.019) 129.081,48.49 cw(c129.081,49.961) LCD1.3@128.041,48.921 ; LCD1.3@128.041,89.699 cw(c129.081,88.659) 129.081,90.13 cw(c129.081,91.601) LCD1.3@128.041,90.561 ; LCD1.3@128.041,131.339 cw(c129.081,130.299) 129.081,131.77 cw(c129.081,133.241) LCD1.3@128.041,132.201 ; LCD2.3@134.62,6.85 ccw(c133.149,6.85) 134.19,7.89 ccw(c135.23,8.931) LCD2.3@135.23,7.459 ; LCD2.3@134.62,48.49 ccw(c133.149,48.49) 134.19,49.53 ccw(c135.23,50.571) LCD2.3@135.23,49.099 ; LCD2.3@134.62,90.13 ccw(c133.149,90.13) 134.19,91.17 ccw(c135.23,92.211) LCD2.3@135.23,90.739 ; LCD2.3@134.62,131.77 ccw(c133.149,131.77) 134.19,132.81 ccw(c135.23,133.851) LCD2.3@135.23,132.379